# Altium PCB 数粒机接收板12通道.PcbDoc (part 3 of 5)
Units mm, origin at the board's own origin, x right, y up, seen from the top; angles counter-clockwise.
Board outline 316 x 52 mm, 2 copper layers (Top Layer, Bottom Layer); 209 components, 115 nets, 614 pads, 284 vias.
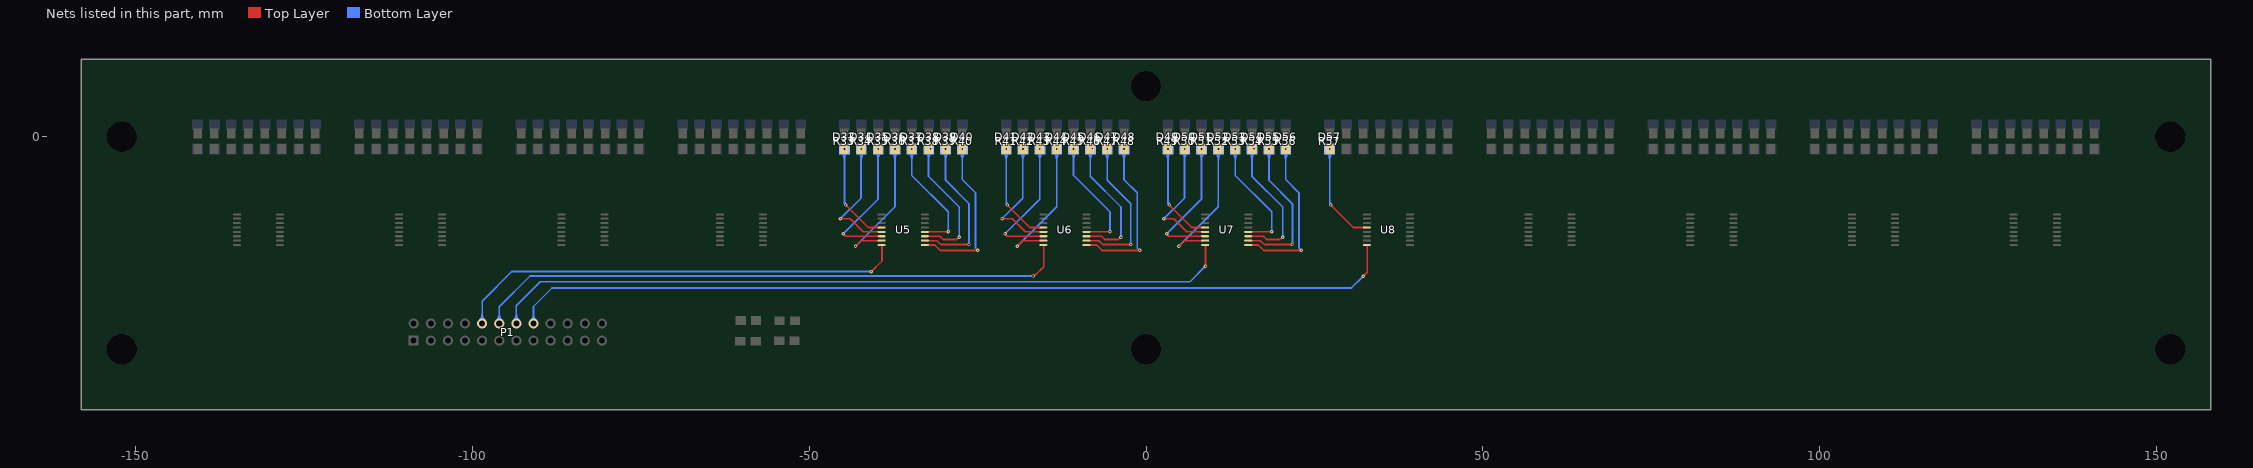
[diagram p3: the nets of this part, all layers, seen from the top]

## Via types
v1: diameter 0.508, hole 0.254, Top Layer to Bottom Layer, 284 vias

## Nets (pads, with @x,y where several pads share a name; then routed paths per layer and width w, separated by ;. In a path a pad name is that pad's centre, name@x,y a point inside that pad or via, vN(x,y) a via of type N, cw(c..) or ccw(c..) an arc to the next point about the centre after c; other vN are vias at no path point) (continued)
CH5: P1.10 U5.8 | length 81.3
  Top Layer w0.254: v1(-40.762,-20.012) -39.176,-18.426 -39.176,-16.101 U5.8@-39.227,-16.05 ; v1@-40.762,-19.885 ccw(c-40.762,-19.578) -40.545,-19.795 ; v1@-40.762,-19.885 ccw(c-40.762,-19.578) -40.545,-19.795 ; v1@-40.762,-19.885 ccw(c-40.762,-19.578) -40.545,-19.795 ; v1@-40.635,-20.012 cw(c-40.329,-20.012) -40.545,-19.795 ; v1@-40.635,-20.012 cw(c-40.329,-20.012) -40.545,-19.795 ; v1@-40.635,-20.012 cw(c-40.329,-20.012) -40.545,-19.795 ; U5.8@-39.243,-16.066 cw(c-39.405,-16.228) -39.176,-16.228 ccw(c-39.405,-16.228) U5.8@-39.243,-16.066
  Bottom Layer w0.254: P1.10@-98.522,-27.708 -98.522,-24.406 -94.102,-19.986 -40.737,-19.986 v1(-40.762,-20.012) ; P1.10@-98.962,-27.267 ccw(c-100.026,-26.204) -98.522,-26.204 ; P1.10@-98.962,-27.267 ccw(c-100.026,-26.204) -98.522,-26.204 ; P1.10@-98.962,-27.267 ccw(c-100.026,-26.204) -98.522,-26.204 ; P1.10@-98.783,-27.447 ccw(c-99.413,-26.817) -98.522,-26.817 ; P1.10@-98.783,-27.447 ccw(c-99.413,-26.817) -98.522,-26.817 ; P1.10@-98.783,-27.447 ccw(c-99.413,-26.817) -98.522,-26.817 ; -98.522,-26.817 ccw(c-97.631,-26.817) P1.10@-98.261,-27.447 ; -98.522,-26.817 ccw(c-97.631,-26.817) P1.10@-98.261,-27.447 ; -98.522,-26.817 ccw(c-97.631,-26.817) P1.10@-98.261,-27.447 ; -98.522,-26.204 ccw(c-97.018,-26.204) P1.10@-98.081,-27.267 ; -98.522,-26.204 ccw(c-97.018,-26.204) P1.10@-98.081,-27.267 ; -98.522,-26.204 ccw(c-97.018,-26.204) P1.10@-98.081,-27.267 ; -41.13,-19.986 cw(c-41.13,-20.38) -40.852,-20.102 ccw(c-41.13,-20.38) -41.13,-19.986
CH5-1: D33.1 R33.2 U5.4 | length 32.6
  Top Layer w0.254: v1(-44.571,-10.111) -41.231,-13.45 U5.4@-39.227,-13.45 ; v1@-44.571,-10.238 cw(c-44.571,-10.544) -44.354,-10.328 ; v1@-44.571,-10.238 cw(c-44.571,-10.544) -44.354,-10.328 ; v1@-44.571,-10.238 cw(c-44.571,-10.544) -44.354,-10.328 ; v1@-44.444,-10.111 ccw(c-44.137,-10.111) -44.354,-10.328 ; v1@-44.444,-10.111 ccw(c-44.137,-10.111) -44.354,-10.328 ; v1@-44.444,-10.111 ccw(c-44.137,-10.111) -44.354,-10.328
  Bottom Layer w0.254: v1(-44.75,-1.8) -44.75,-9.931 v1(-44.571,-10.111) ; D33.1@-45.226,-2.276 cw(c-46.375,-3.425) -44.75,-3.425 ; D33.1@-45.226,-2.276 cw(c-46.375,-3.425) -44.75,-3.425 ; D33.1@-45.226,-2.276 cw(c-46.375,-3.425) -44.75,-3.425 ; D33.1@-45.046,-2.096 cw(c-45.762,-2.812) -44.75,-2.812 ; D33.1@-45.046,-2.096 cw(c-45.762,-2.812) -44.75,-2.812 ; D33.1@-45.046,-2.096 cw(c-45.762,-2.812) -44.75,-2.812 ; D33.1@-44.84,-1.89 cw(c-45.057,-2.107) D33.1@-44.75,-2.107 ; D33.1@-44.84,-1.89 cw(c-45.057,-2.107) D33.1@-44.75,-2.107 ; D33.1@-44.84,-1.89 cw(c-45.057,-2.107) D33.1@-44.75,-2.107 ; -44.75,-9.371 ccw(c-43.831,-9.371) v1@-44.481,-10.021 ; -44.75,-9.371 ccw(c-43.831,-9.371) v1@-44.481,-10.021 ; -44.75,-9.371 ccw(c-43.831,-9.371) v1@-44.481,-10.021 ; -44.75,-3.425 cw(c-43.125,-3.425) D33.1@-44.274,-2.276 ; -44.75,-3.425 cw(c-43.125,-3.425) D33.1@-44.274,-2.276 ; -44.75,-3.425 cw(c-43.125,-3.425) D33.1@-44.274,-2.276 ; -44.75,-2.812 cw(c-43.738,-2.812) D33.1@-44.454,-2.096 ; -44.75,-2.812 cw(c-43.738,-2.812) D33.1@-44.454,-2.096 ; -44.75,-2.812 cw(c-43.738,-2.812) D33.1@-44.454,-2.096 ; D33.1@-44.75,-2.107 cw(c-44.443,-2.107) D33.1@-44.66,-1.89 ; D33.1@-44.75,-2.107 cw(c-44.443,-2.107) D33.1@-44.66,-1.89 ; D33.1@-44.75,-2.107 cw(c-44.443,-2.107) D33.1@-44.66,-1.89
CH5-2: D34.1 R34.2 U5.5 | length 34.7
  Top Layer w0.254: v1(-45.374,-12.171) -43.875,-12.171 -41.946,-14.1 U5.5@-39.227,-14.1 ; v1@-45.284,-12.26 cw(c-45.067,-12.477) -45.067,-12.171 ; v1@-45.284,-12.26 cw(c-45.067,-12.477) -45.067,-12.171 ; v1@-45.284,-12.26 cw(c-45.067,-12.477) -45.067,-12.171 ; v1@-45.284,-12.081 ccw(c-45.067,-11.864) -45.067,-12.171 ; v1@-45.284,-12.081 ccw(c-45.067,-11.864) -45.067,-12.171 ; v1@-45.284,-12.081 ccw(c-45.067,-11.864) -45.067,-12.171
  Bottom Layer w0.254: v1(-45.374,-12.171) -42.289,-9.086 D34.1@-42.289,-2.057 ; v1@-45.374,-12.044 ccw(c-45.374,-11.737) -45.157,-11.954 ; v1@-45.374,-12.044 ccw(c-45.374,-11.737) -45.157,-11.954 ; v1@-45.374,-12.044 ccw(c-45.374,-11.737) -45.157,-11.954 ; v1@-45.247,-12.171 cw(c-44.94,-12.171) -45.157,-11.954 ; v1@-45.247,-12.171 cw(c-44.94,-12.171) -45.157,-11.954 ; v1@-45.247,-12.171 cw(c-44.94,-12.171) -45.157,-11.954 ; D34.1@-42.726,-2.276 cw(c-43.78,-3.33) -42.289,-3.33 ; D34.1@-42.726,-2.276 cw(c-43.78,-3.33) -42.289,-3.33 ; D34.1@-42.726,-2.276 cw(c-43.78,-3.33) -42.289,-3.33 ; D34.1@-42.546,-2.096 cw(c-43.167,-2.717) -42.289,-2.717 ; D34.1@-42.546,-2.096 cw(c-43.167,-2.717) -42.289,-2.717 ; D34.1@-42.546,-2.096 cw(c-43.167,-2.717) -42.289,-2.717 ; -42.289,-3.519 cw(c-40.531,-3.519) D34.1@-41.774,-2.276 ; -42.289,-3.519 cw(c-40.531,-3.519) D34.1@-41.774,-2.276 ; -42.289,-3.519 cw(c-40.531,-3.519) D34.1@-41.774,-2.276 ; -42.289,-2.906 cw(c-41.144,-2.906) D34.1@-41.954,-2.096 ; -42.289,-2.906 cw(c-41.144,-2.906) D34.1@-41.954,-2.096 ; -42.289,-2.906 cw(c-41.144,-2.906) D34.1@-41.954,-2.096 ; D34.1@-42.289,-2.201 cw(c-41.849,-2.201) D34.1@-42.16,-1.89 ; D34.1@-42.289,-2.201 cw(c-41.849,-2.201) D34.1@-42.16,-1.89 ; D34.1@-42.289,-2.201 cw(c-41.849,-2.201) D34.1@-42.16,-1.89
  other v1: -42.25,-1.8
CH5-3: D35.1 R35.2 U5.6 | length 36.1
  Top Layer w0.254: v1(-44.917,-14.38) -44.917,-14.431 -44.598,-14.75 U5.6@-39.227,-14.75 ; v1@-44.79,-14.38 ccw(c-44.36,-14.38) -44.664,-14.684 ; v1@-44.79,-14.38 ccw(c-44.36,-14.38) -44.664,-14.684 ; v1@-44.79,-14.38 ccw(c-44.36,-14.38) -44.664,-14.684
  Bottom Layer w0.254: v1(-44.917,-14.38) -39.775,-9.238 D35.1@-39.775,-2.071 ; v1@-44.917,-14.253 ccw(c-44.917,-13.947) -44.7,-14.164 ; v1@-44.917,-14.253 ccw(c-44.917,-13.947) -44.7,-14.164 ; v1@-44.917,-14.253 ccw(c-44.917,-13.947) -44.7,-14.164 ; v1@-44.79,-14.38 cw(c-44.483,-14.38) -44.7,-14.164 ; v1@-44.79,-14.38 cw(c-44.483,-14.38) -44.7,-14.164 ; v1@-44.79,-14.38 cw(c-44.483,-14.38) -44.7,-14.164 ; D35.1@-40.226,-2.276 cw(c-41.315,-3.365) -39.775,-3.365 ; D35.1@-40.226,-2.276 cw(c-41.315,-3.365) -39.775,-3.365 ; D35.1@-40.226,-2.276 cw(c-41.315,-3.365) -39.775,-3.365 ; D35.1@-40.046,-2.096 cw(c-40.702,-2.752) -39.775,-2.752 ; D35.1@-40.046,-2.096 cw(c-40.702,-2.752) -39.775,-2.752 ; D35.1@-40.046,-2.096 cw(c-40.702,-2.752) -39.775,-2.752 ; -39.775,-3.484 cw(c-38.066,-3.484) D35.1@-39.274,-2.276 ; -39.775,-3.484 cw(c-38.066,-3.484) D35.1@-39.274,-2.276 ; -39.775,-3.484 cw(c-38.066,-3.484) D35.1@-39.274,-2.276 ; -39.775,-2.871 cw(c-38.679,-2.871) D35.1@-39.454,-2.096 ; -39.775,-2.871 cw(c-38.679,-2.871) D35.1@-39.454,-2.096 ; -39.775,-2.871 cw(c-38.679,-2.871) D35.1@-39.454,-2.096 ; D35.1@-39.775,-2.166 cw(c-39.384,-2.166) D35.1@-39.66,-1.89 ; D35.1@-39.775,-2.166 cw(c-39.384,-2.166) D35.1@-39.66,-1.89 ; D35.1@-39.775,-2.166 cw(c-39.384,-2.166) D35.1@-39.66,-1.89
  other v1: -39.75,-1.8
CH5-4: D36.1 R36.2 U5.7 | length 37.6
  Top Layer w0.254: v1(-43.113,-16.237) -42.276,-15.4 U5.7@-39.227,-15.4 ; v1@-43.113,-16.11 ccw(c-43.113,-15.803) -42.896,-16.02 ; v1@-43.113,-16.11 ccw(c-43.113,-15.803) -42.896,-16.02 ; v1@-43.113,-16.11 ccw(c-43.113,-15.803) -42.896,-16.02 ; v1@-42.986,-16.237 cw(c-42.68,-16.237) -42.896,-16.02 ; v1@-42.986,-16.237 cw(c-42.68,-16.237) -42.896,-16.02 ; v1@-42.986,-16.237 cw(c-42.68,-16.237) -42.896,-16.02
  Bottom Layer w0.254: v1(-43.113,-16.237) -37.26,-10.383 D36.1@-37.26,-2.086 ; v1@-43.113,-16.11 ccw(c-43.113,-15.803) -42.896,-16.02 ; v1@-43.113,-16.11 ccw(c-43.113,-15.803) -42.896,-16.02 ; v1@-43.113,-16.11 ccw(c-43.113,-15.803) -42.896,-16.02 ; v1@-42.986,-16.237 cw(c-42.68,-16.237) -42.896,-16.02 ; v1@-42.986,-16.237 cw(c-42.68,-16.237) -42.896,-16.02 ; v1@-42.986,-16.237 cw(c-42.68,-16.237) -42.896,-16.02 ; D36.1@-37.726,-2.276 cw(c-38.851,-3.401) -37.26,-3.401 ; D36.1@-37.726,-2.276 cw(c-38.851,-3.401) -37.26,-3.401 ; D36.1@-37.726,-2.276 cw(c-38.851,-3.401) -37.26,-3.401 ; D36.1@-37.546,-2.096 cw(c-38.237,-2.787) -37.26,-2.787 ; D36.1@-37.546,-2.096 cw(c-38.237,-2.787) -37.26,-2.787 ; D36.1@-37.546,-2.096 cw(c-38.237,-2.787) -37.26,-2.787 ; D36.1@-37.34,-1.89 cw(c-37.532,-2.082) D36.1@-37.26,-2.082 ; D36.1@-37.34,-1.89 cw(c-37.532,-2.082) D36.1@-37.26,-2.082 ; D36.1@-37.34,-1.89 cw(c-37.532,-2.082) D36.1@-37.26,-2.082 ; -37.26,-3.449 cw(c-35.601,-3.449) D36.1@-36.774,-2.276 ; -37.26,-3.449 cw(c-35.601,-3.449) D36.1@-36.774,-2.276 ; -37.26,-3.449 cw(c-35.601,-3.449) D36.1@-36.774,-2.276 ; -37.26,-2.836 cw(c-36.214,-2.836) D36.1@-36.954,-2.096 ; -37.26,-2.836 cw(c-36.214,-2.836) D36.1@-36.954,-2.096 ; -37.26,-2.836 cw(c-36.214,-2.836) D36.1@-36.954,-2.096 ; D36.1@-37.26,-2.131 cw(c-36.919,-2.131) D36.1@-37.16,-1.89 ; D36.1@-37.26,-2.131 cw(c-36.919,-2.131) D36.1@-37.16,-1.89 ; D36.1@-37.26,-2.131 cw(c-36.919,-2.131) D36.1@-37.16,-1.89
  other v1: -37.25,-1.8
CH5-5: D37.1 R37.2 U5.12 | length 33.5
  Top Layer w0.254: U5.12@-32.776,-14.1 -29.371,-14.1 v1(-29.346,-14.076) ; -29.712,-14.1 ccw(c-29.712,-13.71) v1@-29.436,-13.986 ; -29.712,-14.1 ccw(c-29.712,-13.71) v1@-29.436,-13.986 ; -29.712,-14.1 ccw(c-29.712,-13.71) v1@-29.436,-13.986
  Bottom Layer w0.254: D37.1@-34.745,-2.05 -34.745,-5.73 -29.346,-11.129 v1(-29.346,-14.076) ; D37.1@-35.226,-2.276 cw(c-36.386,-3.436) -34.745,-3.436 ; D37.1@-35.226,-2.276 cw(c-36.386,-3.436) -34.745,-3.436 ; D37.1@-35.226,-2.276 cw(c-36.386,-3.436) -34.745,-3.436 ; D37.1@-35.046,-2.096 cw(c-35.773,-2.823) -34.745,-2.823 ; D37.1@-35.046,-2.096 cw(c-35.773,-2.823) -34.745,-2.823 ; D37.1@-35.046,-2.096 cw(c-35.773,-2.823) -34.745,-2.823 ; D37.1@-34.84,-1.89 cw(c-35.068,-2.118) D37.1@-34.745,-2.118 ; D37.1@-34.84,-1.89 cw(c-35.068,-2.118) D37.1@-34.745,-2.118 ; D37.1@-34.84,-1.89 cw(c-35.068,-2.118) D37.1@-34.745,-2.118 ; -34.745,-3.414 cw(c-33.136,-3.414) D37.1@-34.274,-2.276 ; -34.745,-3.414 cw(c-33.136,-3.414) D37.1@-34.274,-2.276 ; -34.745,-3.414 cw(c-33.136,-3.414) D37.1@-34.274,-2.276 ; -34.745,-2.8 cw(c-33.75,-2.8) D37.1@-34.454,-2.096 ; -34.745,-2.8 cw(c-33.75,-2.8) D37.1@-34.454,-2.096 ; -34.745,-2.8 cw(c-33.75,-2.8) D37.1@-34.454,-2.096 ; D37.1@-34.745,-2.095 cw(c-34.455,-2.095) D37.1@-34.66,-1.89 ; D37.1@-34.745,-2.095 cw(c-34.455,-2.095) D37.1@-34.66,-1.89 ; D37.1@-34.745,-2.095 cw(c-34.455,-2.095) D37.1@-34.66,-1.89 ; -29.346,-13.769 cw(c-29.653,-13.769) -29.436,-13.986 ccw(c-29.653,-13.769) -29.346,-13.769 ; -29.346,-13.769 ccw(c-29.04,-13.769) -29.257,-13.986 cw(c-29.04,-13.769) -29.346,-13.769
  other v1: -34.75,-1.8
CH5-6: D38.1 R38.2 U5.11 | length 34
  Top Layer w0.254: U5.11@-32.776,-14.75 -30.602,-14.75 -30.108,-15.244 -28.076,-15.244 v1(-27.721,-14.888)
  Bottom Layer w0.254: D38.1@-32.282,-2.013 -32.282,-5.857 -27.721,-10.418 v1(-27.721,-14.888) ; D38.1@-32.726,-2.276 cw(c-33.798,-3.348) -32.282,-3.348 ; D38.1@-32.726,-2.276 cw(c-33.798,-3.348) -32.282,-3.348 ; D38.1@-32.726,-2.276 cw(c-33.798,-3.348) -32.282,-3.348 ; D38.1@-32.546,-2.096 cw(c-33.185,-2.735) -32.282,-2.735 ; D38.1@-32.546,-2.096 cw(c-33.185,-2.735) -32.282,-2.735 ; D38.1@-32.546,-2.096 cw(c-33.185,-2.735) -32.282,-2.735 ; -32.282,-3.501 cw(c-30.549,-3.501) D38.1@-31.774,-2.276 ; -32.282,-3.501 cw(c-30.549,-3.501) D38.1@-31.774,-2.276 ; -32.282,-3.501 cw(c-30.549,-3.501) D38.1@-31.774,-2.276 ; -32.282,-2.888 cw(c-31.162,-2.888) D38.1@-31.954,-2.096 ; -32.282,-2.888 cw(c-31.162,-2.888) D38.1@-31.954,-2.096 ; -32.282,-2.888 cw(c-31.162,-2.888) D38.1@-31.954,-2.096 ; v1@-27.811,-14.799 ccw(c-28.027,-14.582) -27.721,-14.582 ; v1@-27.811,-14.799 ccw(c-28.027,-14.582) -27.721,-14.582 ; v1@-27.811,-14.799 ccw(c-28.027,-14.582) -27.721,-14.582 ; -27.721,-14.582 ccw(c-27.414,-14.582) v1@-27.631,-14.799 ; -27.721,-14.582 ccw(c-27.414,-14.582) v1@-27.631,-14.799 ; -27.721,-14.582 ccw(c-27.414,-14.582) v1@-27.631,-14.799
  other v1: -31.974,-1.775
CH5-7: D39.1 R39.2 U5.10 | length 38.9
  Top Layer w0.254: U5.10@-32.776,-15.4 -31.019,-15.4 -30.439,-15.981 v1(-26.273,-15.981) ; -26.58,-15.981 cw(c-26.58,-16.287) v1@-26.363,-16.07 ; -26.58,-15.981 ccw(c-26.58,-15.674) v1@-26.363,-15.891 ; -26.58,-15.981 cw(c-26.58,-16.287) v1@-26.363,-16.07 ; -26.58,-15.981 ccw(c-26.58,-15.674) v1@-26.363,-15.891 ; -26.58,-15.981 ccw(c-26.58,-15.674) v1@-26.363,-15.891 ; -26.58,-15.981 cw(c-26.58,-16.287) v1@-26.363,-16.07
  Bottom Layer w0.254: D39.1@-29.742,-2.053 -29.742,-6.441 -26.273,-9.91 v1(-26.273,-15.981) ; D39.1@-30.226,-2.276 cw(c-31.395,-3.445) -29.742,-3.445 ; D39.1@-30.226,-2.276 cw(c-31.395,-3.445) -29.742,-3.445 ; D39.1@-30.226,-2.276 cw(c-31.395,-3.445) -29.742,-3.445 ; D39.1@-30.046,-2.096 cw(c-30.782,-2.832) -29.742,-2.832 ; D39.1@-30.046,-2.096 cw(c-30.782,-2.832) -29.742,-2.832 ; D39.1@-30.046,-2.096 cw(c-30.782,-2.832) -29.742,-2.832 ; D39.1@-29.84,-1.89 cw(c-30.077,-2.127) D39.1@-29.742,-2.127 ; D39.1@-29.84,-1.89 cw(c-30.077,-2.127) D39.1@-29.742,-2.127 ; D39.1@-29.84,-1.89 cw(c-30.077,-2.127) D39.1@-29.742,-2.127 ; -29.742,-3.404 cw(c-28.146,-3.404) D39.1@-29.274,-2.276 ; -29.742,-3.404 cw(c-28.146,-3.404) D39.1@-29.274,-2.276 ; -29.742,-3.404 cw(c-28.146,-3.404) D39.1@-29.274,-2.276 ; -29.742,-2.791 cw(c-28.759,-2.791) D39.1@-29.454,-2.096 ; -29.742,-2.791 cw(c-28.759,-2.791) D39.1@-29.454,-2.096 ; -29.742,-2.791 cw(c-28.759,-2.791) D39.1@-29.454,-2.096 ; D39.1@-29.742,-2.086 cw(c-29.464,-2.086) D39.1@-29.66,-1.89 ; D39.1@-29.742,-2.086 cw(c-29.464,-2.086) D39.1@-29.66,-1.89 ; D39.1@-29.742,-2.086 cw(c-29.464,-2.086) D39.1@-29.66,-1.89 ; v1@-26.363,-15.891 ccw(c-26.58,-15.674) -26.273,-15.674 ; v1@-26.363,-15.891 ccw(c-26.58,-15.674) -26.273,-15.674 ; v1@-26.363,-15.891 ccw(c-26.58,-15.674) -26.273,-15.674 ; -26.273,-15.674 ccw(c-25.966,-15.674) v1@-26.183,-15.891 ; -26.273,-15.674 ccw(c-25.966,-15.674) v1@-26.183,-15.891 ; -26.273,-15.674 ccw(c-25.966,-15.674) v1@-26.183,-15.891
  other v1: -29.75,-1.8
CH5-8: D40.1 R40.2 U5.9 | length 38.3
  Top Layer w0.254: U5.9@-32.776,-16.05 -31.334,-16.05 -30.515,-16.87 -24.978,-16.87 v1(-24.952,-16.844) ; -25.32,-16.87 ccw(c-25.32,-16.476) v1@-25.042,-16.754 ; -25.32,-16.87 ccw(c-25.32,-16.476) v1@-25.042,-16.754 ; -25.32,-16.87 ccw(c-25.32,-16.476) v1@-25.042,-16.754
  Bottom Layer w0.254: D40.1@-27.278,-2.017 -27.278,-6.34 -25.308,-8.31 -25.308,-16.489 v1(-24.952,-16.844) ; D40.1@-27.726,-2.276 cw(c-28.808,-3.358) -27.278,-3.358 ; D40.1@-27.726,-2.276 cw(c-28.808,-3.358) -27.278,-3.358 ; D40.1@-27.726,-2.276 cw(c-28.808,-3.358) -27.278,-3.358 ; D40.1@-27.546,-2.096 cw(c-28.194,-2.744) -27.278,-2.744 ; D40.1@-27.546,-2.096 cw(c-28.194,-2.744) -27.278,-2.744 ; D40.1@-27.546,-2.096 cw(c-28.194,-2.744) -27.278,-2.744 ; -27.278,-3.492 cw(c-25.558,-3.492) D40.1@-26.774,-2.276 ; -27.278,-3.492 cw(c-25.558,-3.492) D40.1@-26.774,-2.276 ; -27.278,-3.492 cw(c-25.558,-3.492) D40.1@-26.774,-2.276 ; -27.278,-2.879 cw(c-26.171,-2.879) D40.1@-26.954,-2.096 ; -27.278,-2.879 cw(c-26.171,-2.879) D40.1@-26.954,-2.096 ; -27.278,-2.879 cw(c-26.171,-2.879) D40.1@-26.954,-2.096 ; D40.1@-27.278,-2.174 cw(c-26.876,-2.174) D40.1@-27.16,-1.89 ; D40.1@-27.278,-2.174 cw(c-26.876,-2.174) D40.1@-27.16,-1.89 ; D40.1@-27.278,-2.174 cw(c-26.876,-2.174) D40.1@-27.16,-1.89
  other v1: -27.25,-1.8
CH6: P1.12 U6.8 | length 104
  Top Layer w0.254: v1(-16.759,-20.647) -16.556,-20.647 -15.176,-19.267 -15.176,-16.101 U6.8@-15.227,-16.05 ; v1@-16.759,-20.52 ccw(c-16.759,-19.723) -16.196,-20.286 ; v1@-16.759,-20.52 ccw(c-16.759,-19.723) -16.196,-20.286 ; v1@-16.759,-20.52 ccw(c-16.759,-19.723) -16.196,-20.286 ; U6.8@-15.243,-16.066 cw(c-15.405,-16.228) -15.176,-16.228 ccw(c-15.405,-16.228) U6.8@-15.243,-16.066
  Bottom Layer w0.254: P1.12@-95.982,-27.708 -95.982,-25.219 -91.41,-20.647 v1(-16.759,-20.647) ; P1.12@-96.422,-27.267 ccw(c-97.486,-26.204) -95.982,-26.204 ; P1.12@-96.422,-27.267 ccw(c-97.486,-26.204) -95.982,-26.204 ; P1.12@-96.422,-27.267 ccw(c-97.486,-26.204) -95.982,-26.204 ; P1.12@-96.243,-27.447 ccw(c-96.873,-26.817) -95.982,-26.817 ; P1.12@-96.243,-27.447 ccw(c-96.873,-26.817) -95.982,-26.817 ; P1.12@-96.243,-27.447 ccw(c-96.873,-26.817) -95.982,-26.817 ; -95.982,-26.817 ccw(c-95.091,-26.817) P1.12@-95.721,-27.447 ; -95.982,-26.817 ccw(c-95.091,-26.817) P1.12@-95.721,-27.447 ; -95.982,-26.817 ccw(c-95.091,-26.817) P1.12@-95.721,-27.447 ; -95.982,-26.204 ccw(c-94.478,-26.204) P1.12@-95.541,-27.267 ; -95.982,-26.204 ccw(c-94.478,-26.204) P1.12@-95.541,-27.267 ; -95.982,-26.204 ccw(c-94.478,-26.204) P1.12@-95.541,-27.267 ; -17.066,-20.647 cw(c-17.066,-20.953) v1@-16.849,-20.737 ; -17.066,-20.647 ccw(c-17.066,-20.34) v1@-16.849,-20.557 ; -17.066,-20.647 cw(c-17.066,-20.953) v1@-16.849,-20.737 ; -17.066,-20.647 ccw(c-17.066,-20.34) v1@-16.849,-20.557 ; -17.066,-20.647 ccw(c-17.066,-20.34) v1@-16.849,-20.557 ; -17.066,-20.647 cw(c-17.066,-20.953) v1@-16.849,-20.737
CH6-1: D41.1 R41.2 U6.4 | length 32.6
  Top Layer w0.254: v1(-20.571,-10.111) -17.231,-13.45 U6.4@-15.227,-13.45 ; v1@-20.571,-10.238 cw(c-20.571,-10.544) -20.354,-10.328 ; v1@-20.571,-10.238 cw(c-20.571,-10.544) -20.354,-10.328 ; v1@-20.571,-10.238 cw(c-20.571,-10.544) -20.354,-10.328 ; v1@-20.444,-10.111 ccw(c-20.137,-10.111) -20.354,-10.328 ; v1@-20.444,-10.111 ccw(c-20.137,-10.111) -20.354,-10.328 ; v1@-20.444,-10.111 ccw(c-20.137,-10.111) -20.354,-10.328
  Bottom Layer w0.254: v1(-20.75,-1.8) -20.75,-9.931 v1(-20.571,-10.111) ; D41.1@-21.226,-2.276 cw(c-22.375,-3.425) -20.75,-3.425 ; D41.1@-21.226,-2.276 cw(c-22.375,-3.425) -20.75,-3.425 ; D41.1@-21.226,-2.276 cw(c-22.375,-3.425) -20.75,-3.425 ; D41.1@-21.046,-2.096 cw(c-21.762,-2.812) -20.75,-2.812 ; D41.1@-21.046,-2.096 cw(c-21.762,-2.812) -20.75,-2.812 ; D41.1@-21.046,-2.096 cw(c-21.762,-2.812) -20.75,-2.812 ; D41.1@-20.84,-1.89 cw(c-21.057,-2.107) D41.1@-20.75,-2.107 ; D41.1@-20.84,-1.89 cw(c-21.057,-2.107) D41.1@-20.75,-2.107 ; D41.1@-20.84,-1.89 cw(c-21.057,-2.107) D41.1@-20.75,-2.107 ; -20.75,-9.371 ccw(c-19.831,-9.371) v1@-20.481,-10.021 ; -20.75,-9.371 ccw(c-19.831,-9.371) v1@-20.481,-10.021 ; -20.75,-9.371 ccw(c-19.831,-9.371) v1@-20.481,-10.021 ; -20.75,-3.425 cw(c-19.125,-3.425) D41.1@-20.274,-2.276 ; -20.75,-3.425 cw(c-19.125,-3.425) D41.1@-20.274,-2.276 ; -20.75,-3.425 cw(c-19.125,-3.425) D41.1@-20.274,-2.276 ; -20.75,-2.812 cw(c-19.738,-2.812) D41.1@-20.454,-2.096 ; -20.75,-2.812 cw(c-19.738,-2.812) D41.1@-20.454,-2.096 ; -20.75,-2.812 cw(c-19.738,-2.812) D41.1@-20.454,-2.096 ; D41.1@-20.75,-2.107 cw(c-20.443,-2.107) D41.1@-20.66,-1.89 ; D41.1@-20.75,-2.107 cw(c-20.443,-2.107) D41.1@-20.66,-1.89 ; D41.1@-20.75,-2.107 cw(c-20.443,-2.107) D41.1@-20.66,-1.89
CH6-2: D42.1 R42.2 U6.5 | length 34.7
  Top Layer w0.254: v1(-21.374,-12.171) -19.875,-12.171 -17.946,-14.1 U6.5@-15.227,-14.1 ; v1@-21.284,-12.26 cw(c-21.067,-12.477) -21.067,-12.171 ; v1@-21.284,-12.26 cw(c-21.067,-12.477) -21.067,-12.171 ; v1@-21.284,-12.26 cw(c-21.067,-12.477) -21.067,-12.171 ; v1@-21.284,-12.081 ccw(c-21.067,-11.864) -21.067,-12.171 ; v1@-21.284,-12.081 ccw(c-21.067,-11.864) -21.067,-12.171 ; v1@-21.284,-12.081 ccw(c-21.067,-11.864) -21.067,-12.171
  Bottom Layer w0.254: v1(-21.374,-12.171) -18.289,-9.086 D42.1@-18.289,-2.057 ; v1@-21.374,-12.044 ccw(c-21.374,-11.737) -21.157,-11.954 ; v1@-21.374,-12.044 ccw(c-21.374,-11.737) -21.157,-11.954 ; v1@-21.374,-12.044 ccw(c-21.374,-11.737) -21.157,-11.954 ; v1@-21.247,-12.171 cw(c-20.94,-12.171) -21.157,-11.954 ; v1@-21.247,-12.171 cw(c-20.94,-12.171) -21.157,-11.954 ; v1@-21.247,-12.171 cw(c-20.94,-12.171) -21.157,-11.954 ; D42.1@-18.726,-2.276 cw(c-19.78,-3.33) -18.289,-3.33 ; D42.1@-18.726,-2.276 cw(c-19.78,-3.33) -18.289,-3.33 ; D42.1@-18.726,-2.276 cw(c-19.78,-3.33) -18.289,-3.33 ; D42.1@-18.546,-2.096 cw(c-19.167,-2.717) -18.289,-2.717 ; D42.1@-18.546,-2.096 cw(c-19.167,-2.717) -18.289,-2.717 ; D42.1@-18.546,-2.096 cw(c-19.167,-2.717) -18.289,-2.717 ; -18.289,-3.519 cw(c-16.531,-3.519) D42.1@-17.774,-2.276 ; -18.289,-3.519 cw(c-16.531,-3.519) D42.1@-17.774,-2.276 ; -18.289,-3.519 cw(c-16.531,-3.519) D42.1@-17.774,-2.276 ; -18.289,-2.906 cw(c-17.144,-2.906) D42.1@-17.954,-2.096 ; -18.289,-2.906 cw(c-17.144,-2.906) D42.1@-17.954,-2.096 ; -18.289,-2.906 cw(c-17.144,-2.906) D42.1@-17.954,-2.096 ; D42.1@-18.289,-2.201 cw(c-17.849,-2.201) D42.1@-18.16,-1.89 ; D42.1@-18.289,-2.201 cw(c-17.849,-2.201) D42.1@-18.16,-1.89 ; D42.1@-18.289,-2.201 cw(c-17.849,-2.201) D42.1@-18.16,-1.89
  other v1: -18.25,-1.8
CH6-3: D43.1 R43.2 U6.6 | length 36.1
  Top Layer w0.254: v1(-20.917,-14.38) -20.917,-14.431 -20.598,-14.75 U6.6@-15.227,-14.75 ; v1@-20.79,-14.38 ccw(c-20.36,-14.38) -20.664,-14.684 ; v1@-20.79,-14.38 ccw(c-20.36,-14.38) -20.664,-14.684 ; v1@-20.79,-14.38 ccw(c-20.36,-14.38) -20.664,-14.684
  Bottom Layer w0.254: v1(-20.917,-14.38) -15.775,-9.238 D43.1@-15.775,-2.071 ; v1@-20.917,-14.253 ccw(c-20.917,-13.947) -20.7,-14.164 ; v1@-20.917,-14.253 ccw(c-20.917,-13.947) -20.7,-14.164 ; v1@-20.917,-14.253 ccw(c-20.917,-13.947) -20.7,-14.164 ; v1@-20.79,-14.38 cw(c-20.483,-14.38) -20.7,-14.164 ; v1@-20.79,-14.38 cw(c-20.483,-14.38) -20.7,-14.164 ; v1@-20.79,-14.38 cw(c-20.483,-14.38) -20.7,-14.164 ; D43.1@-16.226,-2.276 cw(c-17.315,-3.365) -15.775,-3.365 ; D43.1@-16.226,-2.276 cw(c-17.315,-3.365) -15.775,-3.365 ; D43.1@-16.226,-2.276 cw(c-17.315,-3.365) -15.775,-3.365 ; D43.1@-16.046,-2.096 cw(c-16.702,-2.752) -15.775,-2.752 ; D43.1@-16.046,-2.096 cw(c-16.702,-2.752) -15.775,-2.752 ; D43.1@-16.046,-2.096 cw(c-16.702,-2.752) -15.775,-2.752 ; -15.775,-3.484 cw(c-14.066,-3.484) D43.1@-15.274,-2.276 ; -15.775,-3.484 cw(c-14.066,-3.484) D43.1@-15.274,-2.276 ; -15.775,-3.484 cw(c-14.066,-3.484) D43.1@-15.274,-2.276 ; -15.775,-2.871 cw(c-14.679,-2.871) D43.1@-15.454,-2.096 ; -15.775,-2.871 cw(c-14.679,-2.871) D43.1@-15.454,-2.096 ; -15.775,-2.871 cw(c-14.679,-2.871) D43.1@-15.454,-2.096 ; D43.1@-15.775,-2.166 cw(c-15.384,-2.166) D43.1@-15.66,-1.89 ; D43.1@-15.775,-2.166 cw(c-15.384,-2.166) D43.1@-15.66,-1.89 ; D43.1@-15.775,-2.166 cw(c-15.384,-2.166) D43.1@-15.66,-1.89
  other v1: -15.75,-1.8
CH6-4: D44.1 R44.2 U6.7 | length 37.6
  Top Layer w0.254: v1(-19.113,-16.237) -18.276,-15.4 U6.7@-15.227,-15.4 ; v1@-19.113,-16.11 ccw(c-19.113,-15.803) -18.896,-16.02 ; v1@-19.113,-16.11 ccw(c-19.113,-15.803) -18.896,-16.02 ; v1@-19.113,-16.11 ccw(c-19.113,-15.803) -18.896,-16.02 ; v1@-18.986,-16.237 cw(c-18.68,-16.237) -18.896,-16.02 ; v1@-18.986,-16.237 cw(c-18.68,-16.237) -18.896,-16.02 ; v1@-18.986,-16.237 cw(c-18.68,-16.237) -18.896,-16.02
  Bottom Layer w0.254: v1(-19.113,-16.237) -13.26,-10.383 D44.1@-13.26,-2.086 ; v1@-19.113,-16.11 ccw(c-19.113,-15.803) -18.896,-16.02 ; v1@-19.113,-16.11 ccw(c-19.113,-15.803) -18.896,-16.02 ; v1@-19.113,-16.11 ccw(c-19.113,-15.803) -18.896,-16.02 ; v1@-18.986,-16.237 cw(c-18.68,-16.237) -18.896,-16.02 ; v1@-18.986,-16.237 cw(c-18.68,-16.237) -18.896,-16.02 ; v1@-18.986,-16.237 cw(c-18.68,-16.237) -18.896,-16.02 ; D44.1@-13.726,-2.276 cw(c-14.851,-3.401) -13.26,-3.401 ; D44.1@-13.726,-2.276 cw(c-14.851,-3.401) -13.26,-3.401 ; D44.1@-13.726,-2.276 cw(c-14.851,-3.401) -13.26,-3.401 ; D44.1@-13.546,-2.096 cw(c-14.237,-2.787) -13.26,-2.787 ; D44.1@-13.546,-2.096 cw(c-14.237,-2.787) -13.26,-2.787 ; D44.1@-13.546,-2.096 cw(c-14.237,-2.787) -13.26,-2.787 ; D44.1@-13.34,-1.89 cw(c-13.532,-2.082) D44.1@-13.26,-2.082 ; D44.1@-13.34,-1.89 cw(c-13.532,-2.082) D44.1@-13.26,-2.082 ; D44.1@-13.34,-1.89 cw(c-13.532,-2.082) D44.1@-13.26,-2.082 ; -13.26,-3.449 cw(c-11.601,-3.449) D44.1@-12.774,-2.276 ; -13.26,-3.449 cw(c-11.601,-3.449) D44.1@-12.774,-2.276 ; -13.26,-3.449 cw(c-11.601,-3.449) D44.1@-12.774,-2.276 ; -13.26,-2.836 cw(c-12.214,-2.836) D44.1@-12.954,-2.096 ; -13.26,-2.836 cw(c-12.214,-2.836) D44.1@-12.954,-2.096 ; -13.26,-2.836 cw(c-12.214,-2.836) D44.1@-12.954,-2.096 ; D44.1@-13.26,-2.131 cw(c-12.919,-2.131) D44.1@-13.16,-1.89 ; D44.1@-13.26,-2.131 cw(c-12.919,-2.131) D44.1@-13.16,-1.89 ; D44.1@-13.26,-2.131 cw(c-12.919,-2.131) D44.1@-13.16,-1.89
  other v1: -13.25,-1.8
CH6-5: D45.1 R45.2 U6.12 | length 33.5
  Top Layer w0.254: U6.12@-8.776,-14.1 -5.371,-14.1 v1(-5.346,-14.076) ; -5.712,-14.1 ccw(c-5.712,-13.71) v1@-5.436,-13.986 ; -5.712,-14.1 ccw(c-5.712,-13.71) v1@-5.436,-13.986 ; -5.712,-14.1 ccw(c-5.712,-13.71) v1@-5.436,-13.986
  Bottom Layer w0.254: D45.1@-10.745,-2.05 -10.745,-5.73 -5.346,-11.129 v1(-5.346,-14.076) ; D45.1@-11.226,-2.276 cw(c-12.386,-3.436) -10.745,-3.436 ; D45.1@-11.226,-2.276 cw(c-12.386,-3.436) -10.745,-3.436 ; D45.1@-11.226,-2.276 cw(c-12.386,-3.436) -10.745,-3.436 ; D45.1@-11.046,-2.096 cw(c-11.773,-2.823) -10.745,-2.823 ; D45.1@-11.046,-2.096 cw(c-11.773,-2.823) -10.745,-2.823 ; D45.1@-11.046,-2.096 cw(c-11.773,-2.823) -10.745,-2.823 ; D45.1@-10.84,-1.89 cw(c-11.068,-2.118) D45.1@-10.745,-2.118 ; D45.1@-10.84,-1.89 cw(c-11.068,-2.118) D45.1@-10.745,-2.118 ; D45.1@-10.84,-1.89 cw(c-11.068,-2.118) D45.1@-10.745,-2.118 ; -10.745,-3.414 cw(c-9.136,-3.414) D45.1@-10.274,-2.276 ; -10.745,-3.414 cw(c-9.136,-3.414) D45.1@-10.274,-2.276 ; -10.745,-3.414 cw(c-9.136,-3.414) D45.1@-10.274,-2.276 ; -10.745,-2.8 cw(c-9.75,-2.8) D45.1@-10.454,-2.096 ; -10.745,-2.8 cw(c-9.75,-2.8) D45.1@-10.454,-2.096 ; -10.745,-2.8 cw(c-9.75,-2.8) D45.1@-10.454,-2.096 ; D45.1@-10.745,-2.095 cw(c-10.455,-2.095) D45.1@-10.66,-1.89 ; D45.1@-10.745,-2.095 cw(c-10.455,-2.095) D45.1@-10.66,-1.89 ; D45.1@-10.745,-2.095 cw(c-10.455,-2.095) D45.1@-10.66,-1.89 ; -5.346,-13.769 cw(c-5.653,-13.769) -5.436,-13.986 ccw(c-5.653,-13.769) -5.346,-13.769 ; -5.346,-13.769 ccw(c-5.04,-13.769) -5.257,-13.986 cw(c-5.04,-13.769) -5.346,-13.769
  other v1: -10.75,-1.8
CH6-6: D46.1 R46.2 U6.11 | length 34
  Top Layer w0.254: U6.11@-8.776,-14.75 -6.602,-14.75 -6.108,-15.244 -4.076,-15.244 v1(-3.721,-14.888)
  Bottom Layer w0.254: D46.1@-8.282,-2.013 -8.282,-5.857 -3.721,-10.418 v1(-3.721,-14.888) ; D46.1@-8.726,-2.276 cw(c-9.798,-3.348) -8.282,-3.348 ; D46.1@-8.726,-2.276 cw(c-9.798,-3.348) -8.282,-3.348 ; D46.1@-8.726,-2.276 cw(c-9.798,-3.348) -8.282,-3.348 ; D46.1@-8.546,-2.096 cw(c-9.185,-2.735) -8.282,-2.735 ; D46.1@-8.546,-2.096 cw(c-9.185,-2.735) -8.282,-2.735 ; D46.1@-8.546,-2.096 cw(c-9.185,-2.735) -8.282,-2.735 ; -8.282,-3.501 cw(c-6.549,-3.501) D46.1@-7.774,-2.276 ; -8.282,-3.501 cw(c-6.549,-3.501) D46.1@-7.774,-2.276 ; -8.282,-3.501 cw(c-6.549,-3.501) D46.1@-7.774,-2.276 ; -8.282,-2.888 cw(c-7.162,-2.888) D46.1@-7.954,-2.096 ; -8.282,-2.888 cw(c-7.162,-2.888) D46.1@-7.954,-2.096 ; -8.282,-2.888 cw(c-7.162,-2.888) D46.1@-7.954,-2.096 ; v1@-3.811,-14.799 ccw(c-4.027,-14.582) -3.721,-14.582 ; v1@-3.811,-14.799 ccw(c-4.027,-14.582) -3.721,-14.582 ; v1@-3.811,-14.799 ccw(c-4.027,-14.582) -3.721,-14.582 ; -3.721,-14.582 ccw(c-3.414,-14.582) v1@-3.631,-14.799 ; -3.721,-14.582 ccw(c-3.414,-14.582) v1@-3.631,-14.799 ; -3.721,-14.582 ccw(c-3.414,-14.582) v1@-3.631,-14.799
  other v1: -7.974,-1.775
CH6-7: D47.1 R47.2 U6.10 | length 38.9
  Top Layer w0.254: U6.10@-8.776,-15.4 -7.019,-15.4 -6.439,-15.981 v1(-2.273,-15.981) ; -2.58,-15.981 cw(c-2.58,-16.287) v1@-2.363,-16.07 ; -2.58,-15.981 ccw(c-2.58,-15.674) v1@-2.363,-15.891 ; -2.58,-15.981 cw(c-2.58,-16.287) v1@-2.363,-16.07 ; -2.58,-15.981 ccw(c-2.58,-15.674) v1@-2.363,-15.891 ; -2.58,-15.981 ccw(c-2.58,-15.674) v1@-2.363,-15.891 ; -2.58,-15.981 cw(c-2.58,-16.287) v1@-2.363,-16.07
  Bottom Layer w0.254: D47.1@-5.742,-2.053 -5.742,-6.441 -2.273,-9.91 v1(-2.273,-15.981) ; D47.1@-6.226,-2.276 cw(c-7.395,-3.445) -5.742,-3.445 ; D47.1@-6.226,-2.276 cw(c-7.395,-3.445) -5.742,-3.445 ; D47.1@-6.226,-2.276 cw(c-7.395,-3.445) -5.742,-3.445 ; D47.1@-6.046,-2.096 cw(c-6.782,-2.832) -5.742,-2.832 ; D47.1@-6.046,-2.096 cw(c-6.782,-2.832) -5.742,-2.832 ; D47.1@-6.046,-2.096 cw(c-6.782,-2.832) -5.742,-2.832 ; D47.1@-5.84,-1.89 cw(c-6.077,-2.127) D47.1@-5.742,-2.127 ; D47.1@-5.84,-1.89 cw(c-6.077,-2.127) D47.1@-5.742,-2.127 ; D47.1@-5.84,-1.89 cw(c-6.077,-2.127) D47.1@-5.742,-2.127 ; -5.742,-3.404 cw(c-4.146,-3.404) D47.1@-5.274,-2.276 ; -5.742,-3.404 cw(c-4.146,-3.404) D47.1@-5.274,-2.276 ; -5.742,-3.404 cw(c-4.146,-3.404) D47.1@-5.274,-2.276 ; -5.742,-2.791 cw(c-4.759,-2.791) D47.1@-5.454,-2.096 ; -5.742,-2.791 cw(c-4.759,-2.791) D47.1@-5.454,-2.096 ; -5.742,-2.791 cw(c-4.759,-2.791) D47.1@-5.454,-2.096 ; D47.1@-5.742,-2.086 cw(c-5.464,-2.086) D47.1@-5.66,-1.89 ; D47.1@-5.742,-2.086 cw(c-5.464,-2.086) D47.1@-5.66,-1.89 ; D47.1@-5.742,-2.086 cw(c-5.464,-2.086) D47.1@-5.66,-1.89 ; v1@-2.363,-15.891 ccw(c-2.58,-15.674) -2.273,-15.674 ; v1@-2.363,-15.891 ccw(c-2.58,-15.674) -2.273,-15.674 ; v1@-2.363,-15.891 ccw(c-2.58,-15.674) -2.273,-15.674 ; -2.273,-15.674 ccw(c-1.966,-15.674) v1@-2.183,-15.891 ; -2.273,-15.674 ccw(c-1.966,-15.674) v1@-2.183,-15.891 ; -2.273,-15.674 ccw(c-1.966,-15.674) v1@-2.183,-15.891
  other v1: -5.75,-1.8
CH6-8: D48.1 R48.2 U6.9 | length 38.3
  Top Layer w0.254: U6.9@-8.776,-16.05 -7.334,-16.05 -6.515,-16.87 -0.978,-16.87 v1(-0.952,-16.844) ; -1.32,-16.87 ccw(c-1.32,-16.476) v1@-1.042,-16.754 ; -1.32,-16.87 ccw(c-1.32,-16.476) v1@-1.042,-16.754 ; -1.32,-16.87 ccw(c-1.32,-16.476) v1@-1.042,-16.754
  Bottom Layer w0.254: D48.1@-3.278,-2.017 -3.278,-6.34 -1.308,-8.31 -1.308,-16.489 v1(-0.952,-16.844) ; D48.1@-3.726,-2.276 cw(c-4.808,-3.358) -3.278,-3.358 ; D48.1@-3.726,-2.276 cw(c-4.808,-3.358) -3.278,-3.358 ; D48.1@-3.726,-2.276 cw(c-4.808,-3.358) -3.278,-3.358 ; D48.1@-3.546,-2.096 cw(c-4.194,-2.744) -3.278,-2.744 ; D48.1@-3.546,-2.096 cw(c-4.194,-2.744) -3.278,-2.744 ; D48.1@-3.546,-2.096 cw(c-4.194,-2.744) -3.278,-2.744 ; -3.278,-3.492 cw(c-1.558,-3.492) D48.1@-2.774,-2.276 ; -3.278,-3.492 cw(c-1.558,-3.492) D48.1@-2.774,-2.276 ; -3.278,-3.492 cw(c-1.558,-3.492) D48.1@-2.774,-2.276 ; -3.278,-2.879 cw(c-2.171,-2.879) D48.1@-2.954,-2.096 ; -3.278,-2.879 cw(c-2.171,-2.879) D48.1@-2.954,-2.096 ; -3.278,-2.879 cw(c-2.171,-2.879) D48.1@-2.954,-2.096 ; D48.1@-3.278,-2.174 cw(c-2.876,-2.174) D48.1@-3.16,-1.89 ; D48.1@-3.278,-2.174 cw(c-2.876,-2.174) D48.1@-3.16,-1.89 ; D48.1@-3.278,-2.174 cw(c-2.876,-2.174) D48.1@-3.16,-1.89
  other v1: -3.25,-1.8
CH7: P1.14 U7.8 | length 125.1
  Top Layer w0.254: U7.8@8.773,-16.05 8.824,-16.101 8.824,-18.292 8.819,-18.297 v1(8.819,-19.224) ; v1@8.729,-19.135 ccw(c8.512,-18.918) 8.819,-18.918 ; v1@8.729,-19.135 ccw(c8.512,-18.918) 8.819,-18.918 ; v1@8.729,-19.135 ccw(c8.512,-18.918) 8.819,-18.918 ; 8.819,-18.918 ccw(c9.125,-18.918) v1@8.908,-19.135 ; 8.819,-18.918 ccw(c9.125,-18.918) v1@8.908,-19.135 ; 8.819,-18.918 ccw(c9.125,-18.918) v1@8.908,-19.135 ; U7.8@8.757,-16.066 cw(c8.595,-16.228) 8.824,-16.228 ccw(c8.595,-16.228) U7.8@8.757,-16.066
  Bottom Layer w0.254: P1.14@-93.442,-27.708 -93.442,-25.041 -89.911,-21.51 6.533,-21.51 v1(8.819,-19.224) ; P1.14@-93.882,-27.267 ccw(c-94.946,-26.204) -93.442,-26.204 ; P1.14@-93.882,-27.267 ccw(c-94.946,-26.204) -93.442,-26.204 ; P1.14@-93.882,-27.267 ccw(c-94.946,-26.204) -93.442,-26.204 ; P1.14@-93.703,-27.447 ccw(c-94.333,-26.817) -93.442,-26.817 ; P1.14@-93.703,-27.447 ccw(c-94.333,-26.817) -93.442,-26.817 ; P1.14@-93.703,-27.447 ccw(c-94.333,-26.817) -93.442,-26.817 ; -93.442,-26.817 ccw(c-92.551,-26.817) P1.14@-93.181,-27.447 ; -93.442,-26.817 ccw(c-92.551,-26.817) P1.14@-93.181,-27.447 ; -93.442,-26.817 ccw(c-92.551,-26.817) P1.14@-93.181,-27.447 ; -93.442,-26.204 ccw(c-91.938,-26.204) P1.14@-93.001,-27.267 ; -93.442,-26.204 ccw(c-91.938,-26.204) P1.14@-93.001,-27.267 ; -93.442,-26.204 ccw(c-91.938,-26.204) P1.14@-93.001,-27.267 ; 8.602,-19.441 cw(c8.819,-19.658) v1@8.819,-19.351 ; 8.602,-19.441 ccw(c8.385,-19.224) v1@8.692,-19.224 ; 8.602,-19.441 cw(c8.819,-19.658) v1@8.819,-19.351 ; 8.602,-19.441 ccw(c8.385,-19.224) v1@8.692,-19.224 ; 8.602,-19.441 ccw(c8.385,-19.224) v1@8.692,-19.224 ; 8.602,-19.441 cw(c8.819,-19.658) v1@8.819,-19.351
CH7-1: D49.1 R49.2 U7.4 | length 32.6
  Top Layer w0.254: v1(3.429,-10.111) 6.769,-13.45 U7.4@8.773,-13.45 ; v1@3.429,-10.238 cw(c3.429,-10.544) 3.646,-10.328 ; v1@3.429,-10.238 cw(c3.429,-10.544) 3.646,-10.328 ; v1@3.429,-10.238 cw(c3.429,-10.544) 3.646,-10.328 ; v1@3.556,-10.111 ccw(c3.863,-10.111) 3.646,-10.328 ; v1@3.556,-10.111 ccw(c3.863,-10.111) 3.646,-10.328 ; v1@3.556,-10.111 ccw(c3.863,-10.111) 3.646,-10.328
  Bottom Layer w0.254: v1(3.25,-1.8) 3.25,-9.931 v1(3.429,-10.111) ; D49.1@2.774,-2.276 cw(c1.625,-3.425) 3.25,-3.425 ; D49.1@2.774,-2.276 cw(c1.625,-3.425) 3.25,-3.425 ; D49.1@2.774,-2.276 cw(c1.625,-3.425) 3.25,-3.425 ; D49.1@2.954,-2.096 cw(c2.238,-2.812) 3.25,-2.812 ; D49.1@2.954,-2.096 cw(c2.238,-2.812) 3.25,-2.812 ; D49.1@2.954,-2.096 cw(c2.238,-2.812) 3.25,-2.812 ; D49.1@3.16,-1.89 cw(c2.943,-2.107) D49.1@3.25,-2.107 ; D49.1@3.16,-1.89 cw(c2.943,-2.107) D49.1@3.25,-2.107 ; D49.1@3.16,-1.89 cw(c2.943,-2.107) D49.1@3.25,-2.107 ; 3.25,-9.371 ccw(c4.169,-9.371) v1@3.519,-10.021 ; 3.25,-9.371 ccw(c4.169,-9.371) v1@3.519,-10.021 ; 3.25,-9.371 ccw(c4.169,-9.371) v1@3.519,-10.021 ; 3.25,-3.425 cw(c4.875,-3.425) D49.1@3.726,-2.276 ; 3.25,-3.425 cw(c4.875,-3.425) D49.1@3.726,-2.276 ; 3.25,-3.425 cw(c4.875,-3.425) D49.1@3.726,-2.276 ; 3.25,-2.812 cw(c4.262,-2.812) D49.1@3.546,-2.096 ; 3.25,-2.812 cw(c4.262,-2.812) D49.1@3.546,-2.096 ; 3.25,-2.812 cw(c4.262,-2.812) D49.1@3.546,-2.096 ; D49.1@3.25,-2.107 cw(c3.557,-2.107) D49.1@3.34,-1.89 ; D49.1@3.25,-2.107 cw(c3.557,-2.107) D49.1@3.34,-1.89 ; D49.1@3.25,-2.107 cw(c3.557,-2.107) D49.1@3.34,-1.89
CH7-2: D50.1 R50.2 U7.5 | length 34.7
  Top Layer w0.254: v1(2.626,-12.171) 4.125,-12.171 6.054,-14.1 U7.5@8.773,-14.1 ; v1@2.716,-12.26 cw(c2.933,-12.477) 2.933,-12.171 ; v1@2.716,-12.26 cw(c2.933,-12.477) 2.933,-12.171 ; v1@2.716,-12.26 cw(c2.933,-12.477) 2.933,-12.171 ; v1@2.716,-12.081 ccw(c2.933,-11.864) 2.933,-12.171 ; v1@2.716,-12.081 ccw(c2.933,-11.864) 2.933,-12.171 ; v1@2.716,-12.081 ccw(c2.933,-11.864) 2.933,-12.171
  Bottom Layer w0.254: v1(2.626,-12.171) 5.711,-9.086 D50.1@5.711,-2.057 ; v1@2.626,-12.044 ccw(c2.626,-11.737) 2.843,-11.954 ; v1@2.626,-12.044 ccw(c2.626,-11.737) 2.843,-11.954 ; v1@2.626,-12.044 ccw(c2.626,-11.737) 2.843,-11.954 ; v1@2.753,-12.171 cw(c3.06,-12.171) 2.843,-11.954 ; v1@2.753,-12.171 cw(c3.06,-12.171) 2.843,-11.954 ; v1@2.753,-12.171 cw(c3.06,-12.171) 2.843,-11.954 ; D50.1@5.274,-2.276 cw(c4.22,-3.33) 5.711,-3.33 ; D50.1@5.274,-2.276 cw(c4.22,-3.33) 5.711,-3.33 ; D50.1@5.274,-2.276 cw(c4.22,-3.33) 5.711,-3.33 ; D50.1@5.454,-2.096 cw(c4.833,-2.717) 5.711,-2.717 ; D50.1@5.454,-2.096 cw(c4.833,-2.717) 5.711,-2.717 ; D50.1@5.454,-2.096 cw(c4.833,-2.717) 5.711,-2.717 ; 5.711,-3.519 cw(c7.469,-3.519) D50.1@6.226,-2.276 ; 5.711,-3.519 cw(c7.469,-3.519) D50.1@6.226,-2.276 ; 5.711,-3.519 cw(c7.469,-3.519) D50.1@6.226,-2.276 ; 5.711,-2.906 cw(c6.856,-2.906) D50.1@6.046,-2.096 ; 5.711,-2.906 cw(c6.856,-2.906) D50.1@6.046,-2.096 ; 5.711,-2.906 cw(c6.856,-2.906) D50.1@6.046,-2.096 ; D50.1@5.711,-2.201 cw(c6.151,-2.201) D50.1@5.84,-1.89 ; D50.1@5.711,-2.201 cw(c6.151,-2.201) D50.1@5.84,-1.89 ; D50.1@5.711,-2.201 cw(c6.151,-2.201) D50.1@5.84,-1.89
  other v1: 5.75,-1.8
CH7-3: D51.1 R51.2 U7.6 | length 36.1
  Top Layer w0.254: v1(3.083,-14.38) 3.083,-14.431 3.402,-14.75 U7.6@8.773,-14.75 ; v1@3.21,-14.38 ccw(c3.64,-14.38) 3.336,-14.684 ; v1@3.21,-14.38 ccw(c3.64,-14.38) 3.336,-14.684 ; v1@3.21,-14.38 ccw(c3.64,-14.38) 3.336,-14.684
  Bottom Layer w0.254: v1(3.083,-14.38) 8.225,-9.238 D51.1@8.225,-2.071 ; v1@3.083,-14.253 ccw(c3.083,-13.947) 3.3,-14.164 ; v1@3.083,-14.253 ccw(c3.083,-13.947) 3.3,-14.164 ; v1@3.083,-14.253 ccw(c3.083,-13.947) 3.3,-14.164 ; v1@3.21,-14.38 cw(c3.517,-14.38) 3.3,-14.164 ; v1@3.21,-14.38 cw(c3.517,-14.38) 3.3,-14.164 ; v1@3.21,-14.38 cw(c3.517,-14.38) 3.3,-14.164 ; D51.1@7.774,-2.276 cw(c6.685,-3.365) 8.225,-3.365 ; D51.1@7.774,-2.276 cw(c6.685,-3.365) 8.225,-3.365 ; D51.1@7.774,-2.276 cw(c6.685,-3.365) 8.225,-3.365 ; D51.1@7.954,-2.096 cw(c7.298,-2.752) 8.225,-2.752 ; D51.1@7.954,-2.096 cw(c7.298,-2.752) 8.225,-2.752 ; D51.1@7.954,-2.096 cw(c7.298,-2.752) 8.225,-2.752 ; 8.225,-3.484 cw(c9.934,-3.484) D51.1@8.726,-2.276 ; 8.225,-3.484 cw(c9.934,-3.484) D51.1@8.726,-2.276 ; 8.225,-3.484 cw(c9.934,-3.484) D51.1@8.726,-2.276 ; 8.225,-2.871 cw(c9.321,-2.871) D51.1@8.546,-2.096 ; 8.225,-2.871 cw(c9.321,-2.871) D51.1@8.546,-2.096 ; 8.225,-2.871 cw(c9.321,-2.871) D51.1@8.546,-2.096 ; D51.1@8.225,-2.166 cw(c8.616,-2.166) D51.1@8.34,-1.89 ; D51.1@8.225,-2.166 cw(c8.616,-2.166) D51.1@8.34,-1.89 ; D51.1@8.225,-2.166 cw(c8.616,-2.166) D51.1@8.34,-1.89
  other v1: 8.25,-1.8
CH7-4: D52.1 R52.2 U7.7 | length 37.6
  Top Layer w0.254: v1(4.887,-16.237) 5.724,-15.4 U7.7@8.773,-15.4 ; v1@4.887,-16.11 ccw(c4.887,-15.803) 5.104,-16.02 ; v1@4.887,-16.11 ccw(c4.887,-15.803) 5.104,-16.02 ; v1@4.887,-16.11 ccw(c4.887,-15.803) 5.104,-16.02 ; v1@5.014,-16.237 cw(c5.32,-16.237) 5.104,-16.02 ; v1@5.014,-16.237 cw(c5.32,-16.237) 5.104,-16.02 ; v1@5.014,-16.237 cw(c5.32,-16.237) 5.104,-16.02
  Bottom Layer w0.254: v1(4.887,-16.237) 10.74,-10.383 D52.1@10.74,-2.086 ; v1@4.887,-16.11 ccw(c4.887,-15.803) 5.104,-16.02 ; v1@4.887,-16.11 ccw(c4.887,-15.803) 5.104,-16.02 ; v1@4.887,-16.11 ccw(c4.887,-15.803) 5.104,-16.02 ; v1@5.014,-16.237 cw(c5.32,-16.237) 5.104,-16.02 ; v1@5.014,-16.237 cw(c5.32,-16.237) 5.104,-16.02 ; v1@5.014,-16.237 cw(c5.32,-16.237) 5.104,-16.02 ; D52.1@10.274,-2.276 cw(c9.149,-3.401) 10.74,-3.401 ; D52.1@10.274,-2.276 cw(c9.149,-3.401) 10.74,-3.401 ; D52.1@10.274,-2.276 cw(c9.149,-3.401) 10.74,-3.401 ; D52.1@10.454,-2.096 cw(c9.763,-2.787) 10.74,-2.787 ; D52.1@10.454,-2.096 cw(c9.763,-2.787) 10.74,-2.787 ; D52.1@10.454,-2.096 cw(c9.763,-2.787) 10.74,-2.787 ; D52.1@10.66,-1.89 cw(c10.468,-2.082) D52.1@10.74,-2.082 ; D52.1@10.66,-1.89 cw(c10.468,-2.082) D52.1@10.74,-2.082 ; D52.1@10.66,-1.89 cw(c10.468,-2.082) D52.1@10.74,-2.082 ; 10.74,-3.449 cw(c12.399,-3.449) D52.1@11.226,-2.276 ; 10.74,-3.449 cw(c12.399,-3.449) D52.1@11.226,-2.276 ; 10.74,-3.449 cw(c12.399,-3.449) D52.1@11.226,-2.276 ; 10.74,-2.836 cw(c11.786,-2.836) D52.1@11.046,-2.096 ; 10.74,-2.836 cw(c11.786,-2.836) D52.1@11.046,-2.096 ; 10.74,-2.836 cw(c11.786,-2.836) D52.1@11.046,-2.096 ; D52.1@10.74,-2.131 cw(c11.081,-2.131) D52.1@10.84,-1.89 ; D52.1@10.74,-2.131 cw(c11.081,-2.131) D52.1@10.84,-1.89 ; D52.1@10.74,-2.131 cw(c11.081,-2.131) D52.1@10.84,-1.89
  other v1: 10.75,-1.8
CH7-5: D53.1 R53.2 U7.12 | length 33.5
  Top Layer w0.254: U7.12@15.224,-14.1 18.629,-14.1 v1(18.654,-14.076) ; 18.288,-14.1 ccw(c18.288,-13.71) v1@18.564,-13.986 ; 18.288,-14.1 ccw(c18.288,-13.71) v1@18.564,-13.986 ; 18.288,-14.1 ccw(c18.288,-13.71) v1@18.564,-13.986
  Bottom Layer w0.254: D53.1@13.255,-2.05 13.255,-5.73 18.654,-11.129 v1(18.654,-14.076) ; D53.1@12.774,-2.276 cw(c11.614,-3.436) 13.255,-3.436 ; D53.1@12.774,-2.276 cw(c11.614,-3.436) 13.255,-3.436 ; D53.1@12.774,-2.276 cw(c11.614,-3.436) 13.255,-3.436 ; D53.1@12.954,-2.096 cw(c12.227,-2.823) 13.255,-2.823 ; D53.1@12.954,-2.096 cw(c12.227,-2.823) 13.255,-2.823 ; D53.1@12.954,-2.096 cw(c12.227,-2.823) 13.255,-2.823 ; D53.1@13.16,-1.89 cw(c12.932,-2.118) D53.1@13.255,-2.118 ; D53.1@13.16,-1.89 cw(c12.932,-2.118) D53.1@13.255,-2.118 ; D53.1@13.16,-1.89 cw(c12.932,-2.118) D53.1@13.255,-2.118 ; 13.255,-3.414 cw(c14.864,-3.414) D53.1@13.726,-2.276 ; 13.255,-3.414 cw(c14.864,-3.414) D53.1@13.726,-2.276 ; 13.255,-3.414 cw(c14.864,-3.414) D53.1@13.726,-2.276 ; 13.255,-2.8 cw(c14.25,-2.8) D53.1@13.546,-2.096 ; 13.255,-2.8 cw(c14.25,-2.8) D53.1@13.546,-2.096 ; 13.255,-2.8 cw(c14.25,-2.8) D53.1@13.546,-2.096 ; D53.1@13.255,-2.095 cw(c13.545,-2.095) D53.1@13.34,-1.89 ; D53.1@13.255,-2.095 cw(c13.545,-2.095) D53.1@13.34,-1.89 ; D53.1@13.255,-2.095 cw(c13.545,-2.095) D53.1@13.34,-1.89 ; 18.654,-13.769 cw(c18.347,-13.769) 18.564,-13.986 ccw(c18.347,-13.769) 18.654,-13.769 ; 18.654,-13.769 ccw(c18.96,-13.769) 18.743,-13.986 cw(c18.96,-13.769) 18.654,-13.769
  other v1: 13.25,-1.8
CH7-6: D54.1 R54.2 U7.11 | length 34
  Top Layer w0.254: U7.11@15.224,-14.75 17.398,-14.75 17.892,-15.244 19.924,-15.244 v1(20.279,-14.888)
  Bottom Layer w0.254: D54.1@15.718,-2.013 15.718,-5.857 20.279,-10.418 v1(20.279,-14.888) ; D54.1@15.274,-2.276 cw(c14.202,-3.348) 15.718,-3.348 ; D54.1@15.274,-2.276 cw(c14.202,-3.348) 15.718,-3.348 ; D54.1@15.274,-2.276 cw(c14.202,-3.348) 15.718,-3.348 ; D54.1@15.454,-2.096 cw(c14.815,-2.735) 15.718,-2.735 ; D54.1@15.454,-2.096 cw(c14.815,-2.735) 15.718,-2.735 ; D54.1@15.454,-2.096 cw(c14.815,-2.735) 15.718,-2.735 ; 15.718,-3.501 cw(c17.451,-3.501) D54.1@16.226,-2.276 ; 15.718,-3.501 cw(c17.451,-3.501) D54.1@16.226,-2.276 ; 15.718,-3.501 cw(c17.451,-3.501) D54.1@16.226,-2.276 ; 15.718,-2.888 cw(c16.838,-2.888) D54.1@16.046,-2.096 ; 15.718,-2.888 cw(c16.838,-2.888) D54.1@16.046,-2.096 ; 15.718,-2.888 cw(c16.838,-2.888) D54.1@16.046,-2.096 ; v1@20.189,-14.799 ccw(c19.973,-14.582) 20.279,-14.582 ; v1@20.189,-14.799 ccw(c19.973,-14.582) 20.279,-14.582 ; v1@20.189,-14.799 ccw(c19.973,-14.582) 20.279,-14.582 ; 20.279,-14.582 ccw(c20.586,-14.582) v1@20.369,-14.799 ; 20.279,-14.582 ccw(c20.586,-14.582) v1@20.369,-14.799 ; 20.279,-14.582 ccw(c20.586,-14.582) v1@20.369,-14.799
  other v1: 16.026,-1.775
CH7-7: D55.1 R55.2 U7.10 | length 38.9
  Top Layer w0.254: U7.10@15.224,-15.4 16.981,-15.4 17.561,-15.981 v1(21.727,-15.981) ; 21.42,-15.981 cw(c21.42,-16.287) v1@21.637,-16.07 ; 21.42,-15.981 ccw(c21.42,-15.674) v1@21.637,-15.891 ; 21.42,-15.981 cw(c21.42,-16.287) v1@21.637,-16.07 ; 21.42,-15.981 ccw(c21.42,-15.674) v1@21.637,-15.891 ; 21.42,-15.981 ccw(c21.42,-15.674) v1@21.637,-15.891 ; 21.42,-15.981 cw(c21.42,-16.287) v1@21.637,-16.07
  Bottom Layer w0.254: D55.1@18.258,-2.053 18.258,-6.441 21.727,-9.91 v1(21.727,-15.981) ; D55.1@17.774,-2.276 cw(c16.605,-3.445) 18.258,-3.445 ; D55.1@17.774,-2.276 cw(c16.605,-3.445) 18.258,-3.445 ; D55.1@17.774,-2.276 cw(c16.605,-3.445) 18.258,-3.445 ; D55.1@17.954,-2.096 cw(c17.218,-2.832) 18.258,-2.832 ; D55.1@17.954,-2.096 cw(c17.218,-2.832) 18.258,-2.832 ; D55.1@17.954,-2.096 cw(c17.218,-2.832) 18.258,-2.832 ; D55.1@18.16,-1.89 cw(c17.923,-2.127) D55.1@18.258,-2.127 ; D55.1@18.16,-1.89 cw(c17.923,-2.127) D55.1@18.258,-2.127 ; D55.1@18.16,-1.89 cw(c17.923,-2.127) D55.1@18.258,-2.127 ; 18.258,-3.404 cw(c19.854,-3.404) D55.1@18.726,-2.276 ; 18.258,-3.404 cw(c19.854,-3.404) D55.1@18.726,-2.276 ; 18.258,-3.404 cw(c19.854,-3.404) D55.1@18.726,-2.276 ; 18.258,-2.791 cw(c19.241,-2.791) D55.1@18.546,-2.096 ; 18.258,-2.791 cw(c19.241,-2.791) D55.1@18.546,-2.096 ; 18.258,-2.791 cw(c19.241,-2.791) D55.1@18.546,-2.096 ; D55.1@18.258,-2.086 cw(c18.536,-2.086) D55.1@18.34,-1.89 ; D55.1@18.258,-2.086 cw(c18.536,-2.086) D55.1@18.34,-1.89 ; D55.1@18.258,-2.086 cw(c18.536,-2.086) D55.1@18.34,-1.89 ; v1@21.637,-15.891 ccw(c21.42,-15.674) 21.727,-15.674 ; v1@21.637,-15.891 ccw(c21.42,-15.674) 21.727,-15.674 ; v1@21.637,-15.891 ccw(c21.42,-15.674) 21.727,-15.674 ; 21.727,-15.674 ccw(c22.034,-15.674) v1@21.817,-15.891 ; 21.727,-15.674 ccw(c22.034,-15.674) v1@21.817,-15.891 ; 21.727,-15.674 ccw(c22.034,-15.674) v1@21.817,-15.891
  other v1: 18.25,-1.8
CH7-8: D56.1 R56.2 U7.9 | length 38.3
  Top Layer w0.254: U7.9@15.224,-16.05 16.666,-16.05 17.485,-16.87 23.022,-16.87 v1(23.048,-16.844) ; 22.68,-16.87 ccw(c22.68,-16.476) v1@22.958,-16.754 ; 22.68,-16.87 ccw(c22.68,-16.476) v1@22.958,-16.754 ; 22.68,-16.87 ccw(c22.68,-16.476) v1@22.958,-16.754
  Bottom Layer w0.254: D56.1@20.722,-2.017 20.722,-6.34 22.692,-8.31 22.692,-16.489 v1(23.048,-16.844) ; D56.1@20.274,-2.276 cw(c19.192,-3.358) 20.722,-3.358 ; D56.1@20.274,-2.276 cw(c19.192,-3.358) 20.722,-3.358 ; D56.1@20.274,-2.276 cw(c19.192,-3.358) 20.722,-3.358 ; D56.1@20.454,-2.096 cw(c19.806,-2.744) 20.722,-2.744 ; D56.1@20.454,-2.096 cw(c19.806,-2.744) 20.722,-2.744 ; D56.1@20.454,-2.096 cw(c19.806,-2.744) 20.722,-2.744 ; 20.722,-3.492 cw(c22.442,-3.492) D56.1@21.226,-2.276 ; 20.722,-3.492 cw(c22.442,-3.492) D56.1@21.226,-2.276 ; 20.722,-3.492 cw(c22.442,-3.492) D56.1@21.226,-2.276 ; 20.722,-2.879 cw(c21.829,-2.879) D56.1@21.046,-2.096 ; 20.722,-2.879 cw(c21.829,-2.879) D56.1@21.046,-2.096 ; 20.722,-2.879 cw(c21.829,-2.879) D56.1@21.046,-2.096 ; D56.1@20.722,-2.174 cw(c21.124,-2.174) D56.1@20.84,-1.89 ; D56.1@20.722,-2.174 cw(c21.124,-2.174) D56.1@20.84,-1.89 ; D56.1@20.722,-2.174 cw(c21.124,-2.174) D56.1@20.84,-1.89
  other v1: 20.75,-1.8
CH8: P1.16 U8.8 | length 147
  Top Layer w0.254: v1(32.237,-20.672) 32.824,-20.086 32.824,-16.101 U8.8@32.773,-16.05 ; v1@32.237,-20.545 ccw(c32.237,-20.239) 32.454,-20.455 ; v1@32.237,-20.545 ccw(c32.237,-20.239) 32.454,-20.455 ; v1@32.237,-20.545 ccw(c32.237,-20.239) 32.454,-20.455 ; v1@32.364,-20.672 cw(c32.671,-20.672) 32.454,-20.455 ; v1@32.364,-20.672 cw(c32.671,-20.672) 32.454,-20.455 ; v1@32.364,-20.672 cw(c32.671,-20.672) 32.454,-20.455 ; U8.8@32.757,-16.066 cw(c32.595,-16.228) 32.824,-16.228 ccw(c32.595,-16.228) U8.8@32.757,-16.066
  Bottom Layer w0.254: P1.16@-90.902,-27.708 -90.902,-25.168 -88.159,-22.425 30.485,-22.425 v1(32.237,-20.672) ; P1.16@-91.342,-27.267 ccw(c-92.406,-26.204) -90.902,-26.204 ; P1.16@-91.342,-27.267 ccw(c-92.406,-26.204) -90.902,-26.204 ; P1.16@-91.342,-27.267 ccw(c-92.406,-26.204) -90.902,-26.204 ; P1.16@-91.163,-27.447 ccw(c-91.793,-26.817) -90.902,-26.817 ; P1.16@-91.163,-27.447 ccw(c-91.793,-26.817) -90.902,-26.817 ; P1.16@-91.163,-27.447 ccw(c-91.793,-26.817) -90.902,-26.817 ; -90.902,-26.817 ccw(c-90.011,-26.817) P1.16@-90.641,-27.447 ; -90.902,-26.817 ccw(c-90.011,-26.817) P1.16@-90.641,-27.447 ; -90.902,-26.817 ccw(c-90.011,-26.817) P1.16@-90.641,-27.447 ; -90.902,-26.204 ccw(c-89.398,-26.204) P1.16@-90.461,-27.267 ; -90.902,-26.204 ccw(c-89.398,-26.204) P1.16@-90.461,-27.267 ; -90.902,-26.204 ccw(c-89.398,-26.204) P1.16@-90.461,-27.267 ; 32.021,-20.889 cw(c32.237,-21.106) v1@32.237,-20.799 ; 32.021,-20.889 ccw(c31.804,-20.672) v1@32.11,-20.672 ; 32.021,-20.889 cw(c32.237,-21.106) v1@32.237,-20.799 ; 32.021,-20.889 ccw(c31.804,-20.672) v1@32.11,-20.672 ; 32.021,-20.889 ccw(c31.804,-20.672) v1@32.11,-20.672 ; 32.021,-20.889 cw(c32.237,-21.106) v1@32.237,-20.799
CH8-1: D57.1 R57.2 U8.4 | length 32.6
  Top Layer w0.254: v1(27.429,-10.111) 30.769,-13.45 U8.4@32.773,-13.45 ; v1@27.429,-10.238 cw(c27.429,-10.544) 27.646,-10.328 ; v1@27.429,-10.238 cw(c27.429,-10.544) 27.646,-10.328 ; v1@27.429,-10.238 cw(c27.429,-10.544) 27.646,-10.328 ; v1@27.556,-10.111 ccw(c27.863,-10.111) 27.646,-10.328 ; v1@27.556,-10.111 ccw(c27.863,-10.111) 27.646,-10.328 ; v1@27.556,-10.111 ccw(c27.863,-10.111) 27.646,-10.328
  Bottom Layer w0.254: v1(27.25,-1.8) 27.25,-9.931 v1(27.429,-10.111) ; D57.1@26.774,-2.276 cw(c25.625,-3.425) 27.25,-3.425 ; D57.1@26.774,-2.276 cw(c25.625,-3.425) 27.25,-3.425 ; D57.1@26.774,-2.276 cw(c25.625,-3.425) 27.25,-3.425 ; D57.1@26.954,-2.096 cw(c26.238,-2.812) 27.25,-2.812 ; D57.1@26.954,-2.096 cw(c26.238,-2.812) 27.25,-2.812 ; D57.1@26.954,-2.096 cw(c26.238,-2.812) 27.25,-2.812 ; D57.1@27.16,-1.89 cw(c26.943,-2.107) D57.1@27.25,-2.107 ; D57.1@27.16,-1.89 cw(c26.943,-2.107) D57.1@27.25,-2.107 ; D57.1@27.16,-1.89 cw(c26.943,-2.107) D57.1@27.25,-2.107 ; 27.25,-9.371 ccw(c28.169,-9.371) v1@27.519,-10.021 ; 27.25,-9.371 ccw(c28.169,-9.371) v1@27.519,-10.021 ; 27.25,-9.371 ccw(c28.169,-9.371) v1@27.519,-10.021 ; 27.25,-3.425 cw(c28.875,-3.425) D57.1@27.726,-2.276 ; 27.25,-3.425 cw(c28.875,-3.425) D57.1@27.726,-2.276 ; 27.25,-3.425 cw(c28.875,-3.425) D57.1@27.726,-2.276 ; 27.25,-2.812 cw(c28.262,-2.812) D57.1@27.546,-2.096 ; 27.25,-2.812 cw(c28.262,-2.812) D57.1@27.546,-2.096 ; 27.25,-2.812 cw(c28.262,-2.812) D57.1@27.546,-2.096 ; D57.1@27.25,-2.107 cw(c27.557,-2.107) D57.1@27.34,-1.89 ; D57.1@27.25,-2.107 cw(c27.557,-2.107) D57.1@27.34,-1.89 ; D57.1@27.25,-2.107 cw(c27.557,-2.107) D57.1@27.34,-1.89